# Altium PCB heart.PcbDoc (part 1 of 8)
Units mil, origin at the board's own origin, x right, y up, seen from the top; angles counter-clockwise.
Board outline 5000 x 6000 mil, 2 copper layers (Top Layer, Bottom Layer); 76 components, 43 nets, 328 pads, 50 vias.
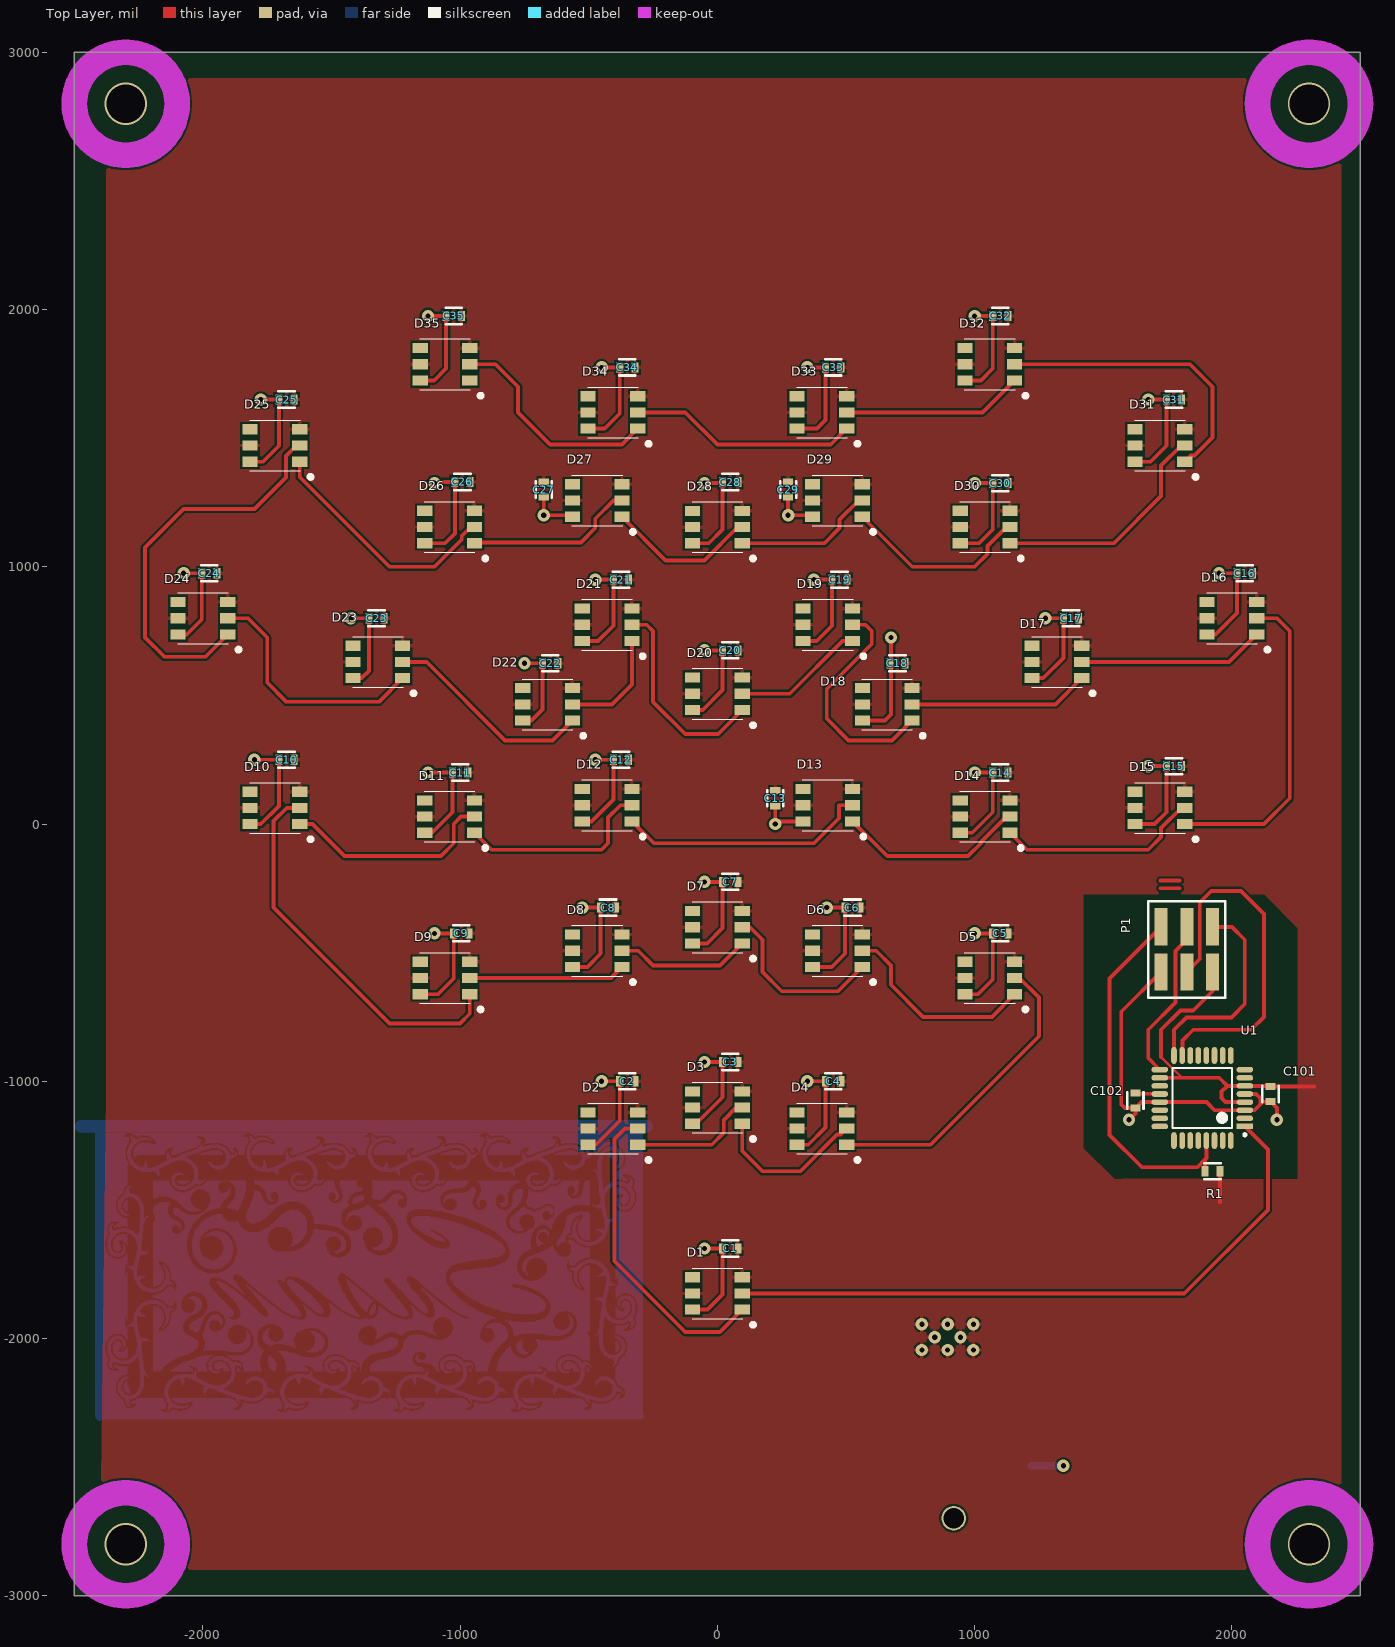
[diagram p0: Top Layer view]
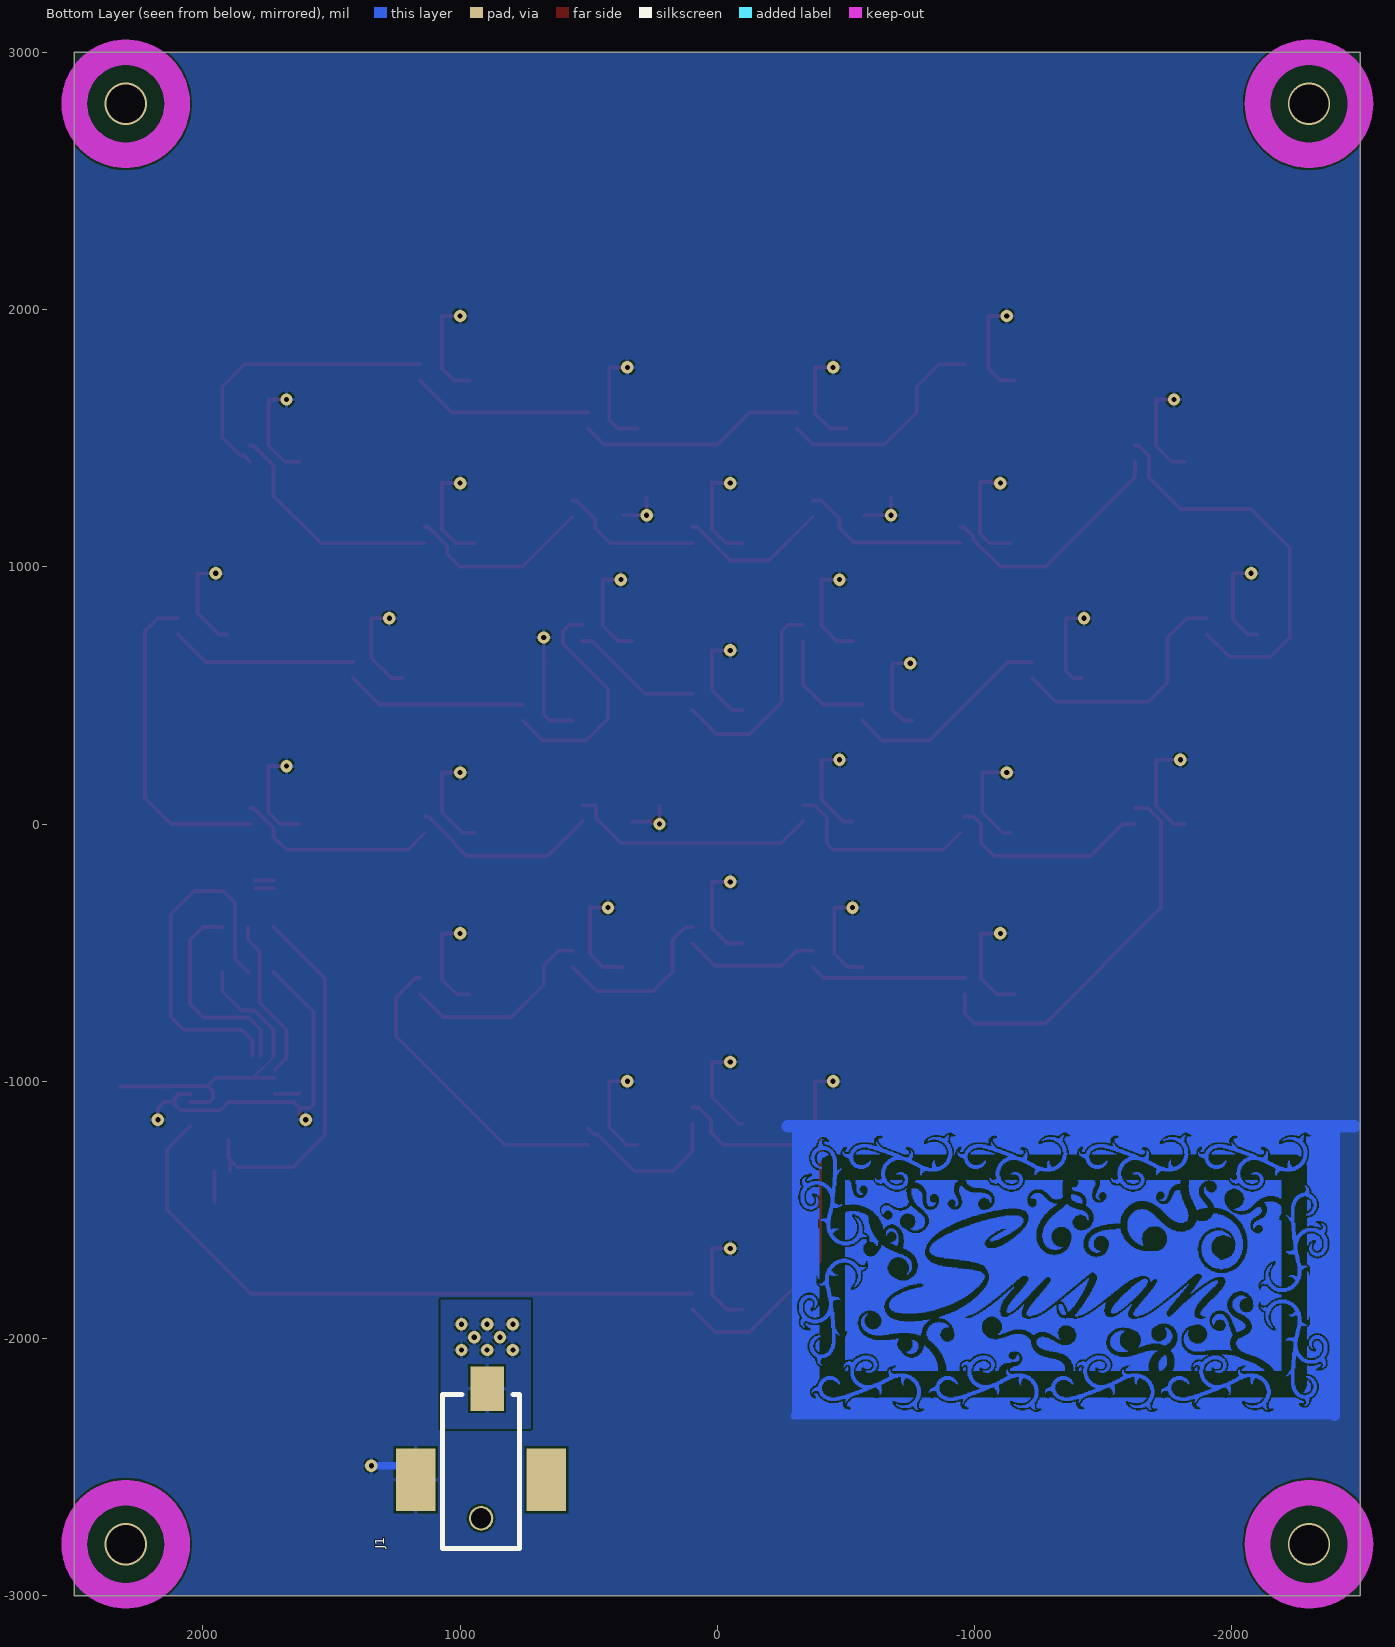
[diagram p1: Bottom Layer view, seen from below]

## Layer stack, top to bottom
Top Solder: solder mask 0.4, Solder Resist, Dk 3.5
Top Layer: signal copper 1.4
Dielectric1: dielectric 12.6, FR-4, Dk 4.8
Bottom Layer: signal copper 1.4
Bottom Solder: solder mask 0.4, Solder Resist, Dk 3.5

## Board outline
-2500,-3000 -2500,3000 2500,3000 2500,-3000

## Design rules (kind name [scope] priority, off if disabled: settings)
Clearance [Not (InRegionRelative(-2500, -2400, -100, -1000) And OnBottomLayer And (Not InAnyNet)) vs Not (InRegionRelative(-2500, -2400, -100, -1000) And OnBottomLayer And (Not InAnyNet))] p1: gap=8
HoleSize [All] p1: absolutevalues=TRUE maxlimit=1000 minlimit=15 maxpercent=80.000 minpercent=20.000
MinimumAnnularRing [All] p1: minimumring=14
MinimumSolderMaskSliver [All] p1: minsoldermaskwidth=0
PlaneConnect [All] p1: planeconnectstyle=Relief reliefexpansion=20 reliefentries=4 reliefconductorwidth=20 reliefairgap=10
PolygonConnect [All] p1: connectstyle=Relief reliefconductorwidth=15 reliefentries=4 polygonreliefangle="90 Angle" airgapwidth=10
RoutingVias [All] p1: holewidth=28 width=50 viastyle="Through Hole" minholewidth=15 minwidth=30 maxholewidth=100 maxwidth=50
ShortCircuit [Not (InRegionRelative(-2500, -2400, -100, -1000) And OnBottomLayer And (Not InAnyNet)) vs Not (InRegionRelative(-2500, -2400, -100, -1000) And OnBottomLayer And (Not InAnyNet))] p1: allowed=FALSE
SilkToSolderMaskClearance SilkscreenOverComponentPads [IsPad] p1: minsilkscreentomaskgap=1 clearancetoexposedcopper=TRUE
SolderMaskExpansion [All] p1: expansion=4
Width [Not (InRegionRelative(-2500, -2400, -100, -1000) And OnBottomLayer And (Not InAnyNet))] p1: maxlimit=1000 minlimit=6 preferedwidth=10
25 further rules are at their usual default settings.

## Classes and differential pairs
channel class LED: D1 D2 D3 D4 D5 D6 D7 D8 D9 D10 D11 D12 D13 D14 D15 D16 D17 D18 D19 D20 D21 D22 D23 D24 D25 D26 D27 D28 D29 D30 D31 D32 D33 D34 D35 D36 D37 D38 D39 D40
net class DI[1..35]: DI1 DI2 DI3 DI4 DI5 DI6 DI7 DI8 DI9 DI10 DI11 DI12 DI13 DI14 DI15 DI16 DI17 DI18 DI19 DI20 DI21 DI22 DI23 DI24 DI25 DI26 DI27 DI28 DI29 DI30 DI31 DI32 DI33 DI34 DI35
component class LEDHeart: C101 C102 J1 P1 R1 U1
component class D35: C35 D35
component class D34: C34 D34
component class D33: C33 D33
component class D32: C32 D32
component class D31: C31 D31
component class D30: C30 D30
component class D29: C29 D29
component class D28: C28 D28
component class D27: C27 D27
component class D26: C26 D26
component class D25: C25 D25
component class D24: C24 D24
component class D23: C23 D23
component class D22: C22 D22
component class D21: C21 D21
component class D20: C20 D20
component class D19: C19 D19
component class D18: C18 D18
component class D17: C17 D17
component class D16: C16 D16
component class D15: C15 D15
component class D14: C14 D14
component class D13: C13 D13
component class D12: C12 D12
component class D11: C11 D11
component class D10: C10 D10
component class D9: C9 D9
component class D8: C8 D8
component class D7: C7 D7
component class D6: C6 D6
component class D5: C5 D5
component class D4: C4 D4
component class D3: C3 D3
component class D2: C2 D2
component class D1: C1 D1
net class DO[1..35]: DO35

## Components (designator, comment, footprint, x,y, rotation, side; value= is the part's Value field where it differs from the comment)
C1 "CAP CER .10UF 25V X7R 10% 0603" 0603 50,-1650 r180 top (schematic designator C3)
C2 "CAP CER .10UF 25V X7R 10% 0603" 0603 -350,-1000 r180 top (schematic designator C3)
C3 "CAP CER .10UF 25V X7R 10% 0603" 0603 50,-925 r180 top
C4 "CAP CER .10UF 25V X7R 10% 0603" 0603 450,-1000 r180 top (schematic designator C3)
C5 "CAP CER .10UF 25V X7R 10% 0603" 0603 1100,-425 r180 top (schematic designator C3)
C6 "CAP CER .10UF 25V X7R 10% 0603" 0603 525,-325 r180 top (schematic designator C3)
C7 "CAP CER .10UF 25V X7R 10% 0603" 0603 50,-225 r180 top (schematic designator C3)
C8 "CAP CER .10UF 25V X7R 10% 0603" 0603 -425,-325 r180 top (schematic designator C3)
C9 "CAP CER .10UF 25V X7R 10% 0603" 0603 -995.47,-425 r180 top (schematic designator C3)
C10 "CAP CER .10UF 25V X7R 10% 0603" 0603 -1675,250 r180 top (schematic designator C3)
C11 "CAP CER .10UF 25V X7R 10% 0603" 0603 -1000,200 r180 top (schematic designator C3)
C12 "CAP CER .10UF 25V X7R 10% 0603" 0603 -375,250 r180 top (schematic designator C3)
C13 "CAP CER .10UF 25V X7R 10% 0603" 0603 225,100 r270 top (schematic designator C3)
C14 "CAP CER .10UF 25V X7R 10% 0603" 0603 1100,200 r180 top (schematic designator C3)
C15 "CAP CER .10UF 25V X7R 10% 0603" 0603 1775,225 r180 top (schematic designator C3)
C16 "CAP CER .10UF 25V X7R 10% 0603" 0603 2050,975 r180 top (schematic designator C3)
C17 "CAP CER .10UF 25V X7R 10% 0603" 0603 1375,800 r180 top (schematic designator C3)
C18 "CAP CER .10UF 25V X7R 10% 0603" 0603 700,625 r180 top (schematic designator C3)
C19 "CAP CER .10UF 25V X7R 10% 0603" 0603 475,950 r180 top (schematic designator C3)
C20 "CAP CER .10UF 25V X7R 10% 0603" 0603 50,675 r180 top (schematic designator C3)
C21 "CAP CER .10UF 25V X7R 10% 0603" 0603 -375,950 r180 top (schematic designator C3)
C22 "CAP CER .10UF 25V X7R 10% 0603" 0603 -650,625 r180 top (schematic designator C3)
C23 "CAP CER .10UF 25V X7R 10% 0603" 0603 -1325,800 r180 top (schematic designator C3)
C24 "CAP CER .10UF 25V X7R 10% 0603" 0603 -1975,975 r180 top (schematic designator C3)
C25 "CAP CER .10UF 25V X7R 10% 0603" 0603 -1675,1650 r180 top (schematic designator C3)
C26 "CAP CER .10UF 25V X7R 10% 0603" 0603 -991,1329.55 r180 top (schematic designator C3)
C27 "CAP CER .10UF 25V X7R 10% 0603" 0603 -675,1300 r270 top (schematic designator C3)
C28 "CAP CER .10UF 25V X7R 10% 0603" 0603 50,1329.26 r180 top (schematic designator C3)
C29 "CAP CER .10UF 25V X7R 10% 0603" 0603 275,1300 r270 top (schematic designator C3)
C30 "CAP CER .10UF 25V X7R 10% 0603" 0603 1100,1325 r180 top (schematic designator C3)
C31 "CAP CER .10UF 25V X7R 10% 0603" 0603 1775,1650 r180 top (schematic designator C3)
C32 "CAP CER .10UF 25V X7R 10% 0603" 0603 1100,1975 r180 top (schematic designator C3)
C33 "CAP CER .10UF 25V X7R 10% 0603" 0603 450,1775 r180 top (schematic designator C3)
C34 "CAP CER .10UF 25V X7R 10% 0603" 0603 -350,1775 r180 top (schematic designator C3)
C35 "CAP CER .10UF 25V X7R 10% 0603" 0603 -1025,1975 r180 top (schematic designator C3)
C101 "CAP CER .10UF 25V X7R 10% 0603" 0603 2150,-1050 r90 top
C102 "CAP CER .10UF 25V X7R 10% 0603" 0603 1625,-1075 r90 top
D1 "WS2812" LED_5050 0,-1825 r0 top
D2 "WS2812" LED_5050 -406,-1183.91 r0 top (schematic designator D1)
D3 "WS2812" LED_5050 0,-1102.5 r0 top (schematic designator D1)
D4 "WS2812" LED_5050 406.15,-1183.91 r0 top (schematic designator D1)
D5 "WS2812" LED_5050 1059.02,-598.65 r0 top (schematic designator D1)
D6 "WS2812" LED_5050 466.69,-492.55 r0 top (schematic designator D1)
D7 "WS2812" LED_5050 0,-401.25 r0 top (schematic designator D1)
D8 "WS2812" LED_5050 -467,-492.55 r0 top (schematic designator D1)
D9 "WS2812" LED_5050 -1059,-598.65 r0 top (schematic designator D1)
D10 "WS2812" LED_5050 -1720,62.6 r0 top (schematic designator D1)
D11 "WS2812" LED_5050 -1041,28.81 r0 top (schematic designator D1)
D12 "WS2812" LED_5050 -428.68,73.12 r0 top (schematic designator D1)
D13 "WS2812" LED_5050 429,73.12 r0 top (schematic designator D1)
D14 "WS2812" LED_5050 1040.93,28.81 r0 top (schematic designator D1)
D15 "WS2812" LED_5050 1720.48,62.6 r0 top (schematic designator D1)
D16 "WS2812" LED_5050 2000,800 r0 top (schematic designator D1)
D17 "WS2812" LED_5050 1320,630 r0 top (schematic designator D1)
D18 "WS2812" LED_5050 660,465 r0 top (schematic designator D1)
D19 "WS2812" LED_5050 429,774.38 r0 top (schematic designator D1)
D20 "WS2812" LED_5050 0,506.25 r0 top (schematic designator D1)
D21 "WS2812" LED_5050 -428.68,774.38 r0 top (schematic designator D1)
D22 "WS2812" LED_5050 -660,465 r0 top (schematic designator D1)
D23 "WS2812" LED_5050 -1320,630 r0 top (schematic designator D1)
D24 "WS2812" LED_5050 -2000,800 r0 top (schematic designator D1)
D25 "WS2812" LED_5050 -1720,1471.41 r0 top (schematic designator D1)
D26 "WS2812" LED_5050 -1041,1154.55 r0 top (schematic designator D1)
D27 "WS2812" LED_5050 -467,1257.55 r0 top (schematic designator D1)
D28 "WS2812" LED_5050 0,1154.26 r0 top (schematic designator D1)
D29 "WS2812" LED_5050 466.69,1257.55 r0 top (schematic designator D1)
D30 "WS2812" LED_5050 1040.93,1154.55 r0 top (schematic designator D1)
D31 "WS2812" LED_5050 1720.48,1471.41 r0 top (schematic designator D1)
D32 "WS2812" LED_5050 1059.02,1787.18 r0 top (schematic designator D1)
D33 "WS2812" LED_5050 406.15,1599.9 r0 top (schematic designator D1)
D34 "WS2812" LED_5050 -406,1599.9 r0 top (schematic designator D1)
D35 "WS2812" LED_5050 -1059,1787.18 r0 top (schematic designator D1)
J1 "CONN_PWR2.0_SMT" CONN_PWR2.0_SMT 918.62,-2817.05 r90 bottom
P1 "Header, 3-Pin, Dual row" CONN_HDR_SMT_6_2R 1925,-400 r270 top
R1 "RES_4.70K_OHM_1/10W_1%_0603_SMD" 0603 1925,-1350 r0 top
U1 "IC_AVR_MCU_4K_10MHZ_1.8V_32TQFP" 32A_N 1885.24,-1065.35 r180 top

## Footprints (in the part's own frame and the unit in brackets; to place one, negate y for a bottom-side part, rotate by r counter-clockwise, add the part's x,y. Pads: shape width x height; smd on the part's side, far side on the other; paste and mask are expansions set on the pad)
32A_N [mm] "Thin QFP, 32-Leads, Body 7x7mm, Pitch 0.8mm, IPC Medium Density"
  rect 1.65x0.55 smd: 1(-4.2,2.8)
  oval 1.65x0.55 smd: 2(-4.2,2) 3(-4.2,1.2) 4(-4.2,0.4) 5(-4.2,-0.4) 6(-4.2,-1.2) 7(-4.2,-2) 8(-4.2,-2.8) 17(4.2,-2.8) 18(4.2,-2) 19(4.2,-1.2) 20(4.2,-0.4) 21(4.2,0.4) 22(4.2,1.2) 23(4.2,2) 24(4.2,2.8)
  oval 0.55x1.65 smd: 9(-2.8,-4.2) 10(-2,-4.2) 11(-1.2,-4.2) 12(-0.4,-4.2) 13(0.4,-4.2) 14(1.2,-4.2) 15(2,-4.2) 16(2.8,-4.2) 25(2.8,4.2) 26(2,4.2) 27(1.2,4.2) 28(0.4,4.2) 29(-0.4,4.2) 30(-1.2,4.2) 31(-2,4.2) 32(-2.8,4.2)
  silkscreen extent -4.33,-2.95 2.95,3.75, body extent -3.5,-3.5 3.5,3.5, height 1.2
0603 [mm]
  rect 0.7x1 smd: 1(-0.75,0) 2(0.75,0)
  silkscreen extent -0.8,-0.8 0.8,0.8, body extent -0.8,-0.8 0.8,0.8, height 0.45
CONN_HDR_SMT_6_2R [mil]
  rect 145x50 smd: 1(0,0) 2(175,0) 3(0,-100) 4(175,-100) 5(0,-200) 6(175,-200)
  silkscreen extent -100,-250 275,50, body extent -50,-250 225,50, height 379
CONN_PWR2.0_SMT [mm]
  rect 4.4x3.3 smd: 1(15.8,-0.6)
  rect 6.2x3.9 smd: 2(6.8,6.45) 3(6.8,-6.45)
  round 2.413 hole 2: ""(3,0)
  silkscreen extent 0,-3.81 15.24,3.81, body extent 0,-7.6 17.1,7.6, height 11.05
LED_5050 [mm]
  rect 1.5x1 smd: 1(2.45,-1.6) 2(2.45,0) 3(2.45,1.6) 4(-2.45,1.6) 5(-2.45,0) 6(-2.45,-1.6)
  silkscreen extent -2.5,-3.28 3.7,2.5, body extent -2.65,-2.5 2.65,2.5, height 1.6

## Part data
C1 C2 C3 C4 C5 C6 C7 C8 C9 C10 C11 C12 C13 C14 C15 C16 C17 C18 C19 C20 C21 C22 C23 C24 C25 C26 C27 C28 C29 C30 C31 C32 C33 C34 C35 C101 C102: library part CAP_CER_.10UF_25V_X7R_10%_0603_1
J1: "CONN PWR JACK 2.0X6.3MM SMT"
P1: library part CONN_Header_0.100_6pos
R1: "RES 4.70K OHM 1/10W 1% 0603 SMD"
U1: library part IC_AVR_MCU_4K_10MHZ_1.8V_32TQFP_1, "IC AVR MCU 4K 10MHZ 1.8V 32TQFP"

## Via types
v1: diameter 48, hole 20, Top Layer to Bottom Layer, 46 vias
v2: diameter 165, hole 150, Top Layer to Bottom Layer, 4 vias

## Nets (pads, with @x,y where several pads share a name; then routed paths per layer and width w, separated by ;. In a path a pad name is that pad's centre, name@x,y a point inside that pad or via, vN(x,y) a via of type N, cw(c..) or ccw(c..) an arc to the next point about the centre after c; other vN are vias at no path point)
DI1: D1.2 U1.1 | length 2539.6
  Top Layer w15: D1.2@96.46,-1825 1815,-1825 2140,-1500 2140,-1265 U1.1@2050.59,-1175.59
DI2: D1.1 D2.2 | length 1228.9
  Top Layer w15: D2.2@-309.54,-1183.91 -358.91,-1183.91 -400,-1225 -400,-1700 -125,-1975 9.45,-1975 D1.1@96.46,-1887.99
DI3: D2.1 D3.2 | length 495.1
  Top Layer w15: D2.1@-309.54,-1246.91 -21.91,-1246.91 25,-1200 25,-1150 72.5,-1102.5 D3.2@96.46,-1102.5
DI4: D3.1 D4.2 | length 613.4
  Top Layer w15: D3.1@96.46,-1165.49 96.46,-1271.46 175,-1350 322.72,-1350 465,-1207.72 478.8,-1207.72 D4.2@502.61,-1183.91
DI5: D4.1 D5.2 | length 1198.3
  Top Layer w15: D4.1@502.61,-1246.91 828.09,-1246.91 1250,-825 1250,-675 1173.65,-598.65 D5.2@1155.47,-598.65
DI6: D5.1 D6.2 | length 779.5
  Top Layer w15: D6.2@563.15,-492.54 617.54,-492.54 675,-550 675,-625 800,-750 1067.12,-750 D5.1@1155.47,-661.64
DI7: D6.1 D7.2 | length 682.1
  Top Layer w15: D7.2@96.46,-401.25 126.25,-401.25 175,-450 175,-575 250,-650 468.68,-650 D6.1@563.15,-555.54
DI8: D7.1 D8.2 | length 526.3
  Top Layer w15: D8.2@-370.54,-492.54 -307.46,-492.54 -250,-550 10.7,-550 D7.1@96.46,-464.24
DI9: D8.1 D9.2 | length 609.9
  Top Layer w15: D9.2@-962.54,-598.65 -413.66,-598.65 D8.1@-370.54,-555.54
DI10: D9.1 D10.2 | length 1499.6
  Top Layer w15: D10.2@-1623.54,62.6 -1674.21,62.6 -1725,11.82 -1725,-325 -1275,-775 -1000,-775 -962.54,-737.54 D9.1@-962.54,-661.64
DI11: D10.1 D11.2 | length 824.5
  Top Layer w15: D10.1@-1623.54,-0.39 -1574.61,-0.39 -1450,-125 -1075,-125 -1025,-75 -1025,0 -996.19,28.81 D11.2@-958.34,28.81
DI12: D11.1 D12.2 | length 769.9
  Top Layer w15: D11.1@-944.54,-34.18 -878.72,-100 -450,-100 -425,-75 -425,25 -376.87,73.13 D12.2@-332.23,73.13
DI13: D12.1 D13.2 | length 983.6
  Top Layer w15: D12.1@-332.23,10.13 -247.09,-75 375,-75 472.47,22.47 472.47,72.47 473.13,73.13 D13.2@525.46,73.13
DI14: D13.1 D14.2 | length 734.7
  Top Layer w15: D13.1@525.46,10.13 660.59,-125 975,-125 1025,-75 1025,-69.77 1123.59,28.81 D14.2@1137.38,28.81
DI15: D14.1 D15.2 | length 794.4
  Top Layer w15: D14.1@1137.38,-34.18 1203.2,-100 1675,-100 1725,-50 1725,-15.53 1803.14,62.6 D15.2@1816.93,62.6
DI16: D15.1 D16.2 | length 1248.9
  Top Layer w15: D15.1@1816.93,-0.39 2124.61,-0.39 2225,100 2225,750 2175,800 D16.2@2096.46,800
DI17: D16.1 D17.2 | length 724.3
  Top Layer w15: D17.2@1416.46,630 1989.45,630 D16.1@2096.46,737.01
DI18: D17.1 D18.2 | length 702.3
  Top Layer w15: D18.2@756.46,465 1314.45,465 D17.1@1416.46,567.01
DI19: D18.1 D19.2 | length 895.7
  Top Layer w15: D19.2@525.46,774.38 575.62,774.38 600,750 600,700 425,525 425,410 510,325 679.45,325 D18.1@756.46,402.01
DI20: D19.1 D20.2 | length 514
  Top Layer w15: D20.2@96.46,506.25 281.25,506.25 486.38,711.38 D19.1@525.46,711.38
DI21: D20.1 D21.2 | length 804.2
  Top Layer w15: D21.2@-332.23,774.38 -274.38,774.38 -250,750 -250,475 -125,350 3.2,350 D20.1@96.46,443.26
DI22: D21.1 D22.2 | length 432.1
  Top Layer w15: D22.2@-563.54,465 -410,465 -332.23,542.77 D21.1@-332.23,711.38
DI23: D22.1 D23.2 | length 818.2
  Top Layer w15: D23.2@-1223.54,630 -1130,630 -825,325 -640.55,325 D22.1@-563.54,402.01
DI24: D23.1 D24.2 | length 955.2
  Top Layer w15: D24.2@-1903.54,800 -1825,800 -1750,725 -1750,550 -1675,475 -1315.55,475 D23.1@-1223.54,567.01
DI25: D24.1 D25.2 | length 1553.3
  Top Layer w15: D24.1@-1903.54,737.01 -1990.55,650 -2150,650 -2225,725 -2225,1075 -2075,1225 -1800,1225 -1677.53,1347.47 -1677.53,1431.23 -1637.34,1471.42 D25.2@-1623.54,1471.42
DI26: D25.1 D26.2 | length 954.8
  Top Layer w15: D25.1@-1623.54,1408.42 -1623.54,1348.54 -1275,1000 -1100,1000 -993.57,1106.43 -993.57,1119.32 -958.34,1154.55 D26.2@-944.54,1154.55
DI27: D26.1 D27.2 | length 664.3
  Top Layer w15: D26.1@-944.54,1091.56 -941.6,1094.5 -530.5,1094.5 -475,1150 -475,1186.82 -404.27,1257.55 D27.2@-370.54,1257.55
DI28: D27.1 D28.2 | length 590.8
  Top Layer w15: D27.1@-370.54,1194.55 -200.99,1025 -50,1025 79.26,1154.26 D28.2@96.46,1154.26
DI29: D28.1 D29.2 | length 555
  Top Layer w15: D28.1@96.46,1091.27 416.27,1091.27 475,1150 475,1183.2 549.35,1257.55 D29.2@563.15,1257.55
DI30: D29.1 D30.2 | length 737
  Top Layer w15: D29.1@563.15,1194.55 757.7,1000 1000,1000 1050,1050 1050,1080.97 1123.59,1154.55 D30.2@1137.38,1154.55
DI31: D30.1 D31.2 | length 906.2
  Top Layer w15: D30.1@1137.38,1091.56 1541.56,1091.56 1725,1275 1725,1393.28 1803.14,1471.42 D31.2@1816.93,1471.42
DI32: D31.1 D32.2 | length 1150.1
  Top Layer w15: D32.2@1155.47,1787.18 1837.82,1787.18 1925,1700 1925,1502.69 1854.54,1432.23 1840.74,1432.23 D31.1@1816.93,1408.42
DI33: D32.1 D33.2 | length 704.3
  Top Layer w15: D33.2@502.61,1599.9 1031.19,1599.9 D32.1@1155.47,1724.19
DI34: D33.1 D34.2 | length 889.5
  Top Layer w15: D34.2@-309.54,1599.9 -124.9,1599.9 0,1475 440.7,1475 D33.1@502.61,1536.91
DI35: D34.1 D35.2 | length 866.5
  Top Layer w15: D35.2@-962.54,1787.18 -862.18,1787.18 -775,1700 -775,1600 -650,1475 -371.45,1475 D34.1@-309.54,1536.91
DO35: D35.1
GND: C1.2 C2.2 C3.2 C4.2 C5.2 C6.2 C7.2 C8.2 C9.2 C10.2 C11.2 C12.2 C13.2 C14.2 C15.2 C16.2 C17.2 C18.2 C19.2 C20.2 C21.2 C22.2 C23.2 C24.2 C25.2 C26.2 C27.2 C28.2 C29.2 C30.2 C31.2 C32.2 C33.2 C34.2 C35.2 C101.1 C102.1 D1.6 D2.6 D3.6 D4.6 D5.6 D6.6 D7.6 D8.6 D9.6 D10.6 D11.6 D12.6 D13.6 D14.6 D15.6 D16.6 D17.6 D18.6 D19.6 D20.6 D21.6 D22.6 D23.6 D24.6 D25.6 D26.6 D27.6 D28.6 D29.6 D30.6 D31.6 D32.6 D33.6 D34.6 D35.6 J1.2 P1.6 U1.3 U1.5 U1.21 | length 20988
  Top Layer w15: D24.6@-2096.46,737.01 -2062.99,737.01 -2004.53,795.47 C24.2@-2004.53,975 v1(-2075,975) ; D10.6@-1816.46,-0.39 -1775.39,-0.39 -1704.53,70.47 C10.2@-1704.53,250 v1(-1800,250) ; D25.6@-1816.46,1408.42 -1766.58,1408.42 -1704.53,1470.47 C25.2@-1704.53,1650 v1(-1775,1650) ; v1(-1425,800) C23.2@-1354.53,800 -1354.53,595.47 -1382.99,567.01 D23.6@-1416.46,567.01 ; D9.6@-1155.46,-661.64 -1086.64,-661.64 -1025,-600 C9.2@-1025,-425 v1(-1100,-425) ; D35.6@-1155.46,1724.19 -1100.81,1724.19 -1054.53,1770.47 C35.2@-1054.53,1975 v1(-1125,1975) ; D11.6@-1137.46,-34.18 -1109.18,-34.18 -1029.53,45.47 C11.2@-1029.53,200 v1(-1125,200) ; D26.6@-1137.46,1091.56 -1058.44,1091.56 -1020.57,1129.43 C26.2@-1020.57,1329.51 ; v1(-1100,1325) -1095.49,1329.51 C26.2@-1020.57,1329.51 ; C26.2@-1020.53,1329.55 C26.2@-1020.57,1329.51 ; D22.6@-756.46,402.01 -722.99,402.01 -679.53,445.47 C22.2@-679.53,625 v1(-750,625) ; C27.2@-675,1270.47 v1(-675,1200) D27.6@-568.9,1200 ; D8.6@-563.46,-555.54 -505.54,-555.54 -454.53,-504.53 C8.2@-454.53,-325 v1(-525,-325) ; D12.6@-525.14,10.13 -489.87,10.13 -404.53,95.47 C12.2@-404.53,250 v1(-475,250) ; D21.6@-525.14,711.38 -463.62,711.38 -404.53,770.47 C21.2@-404.53,950 v1(-475,950) ; D2.6@-502.46,-1246.91 -471.91,-1246.91 -379.53,-1154.53 C2.2@-379.53,-1000 v1(-450,-1000) ; D34.6@-502.46,1536.91 -438.09,1536.91 -379.53,1595.47 C34.2@-379.53,1775 v1(-450,1775) ; D1.6@-96.46,-1887.99 -37.99,-1887.99 20.47,-1829.53 C1.2@20.47,-1650 v1(-50,-1650) ; D3.6@-96.46,-1165.49 -82.66,-1165.49 20.47,-1062.36 C3.2@20.47,-925 v1(-50,-925) ; D7.6@-96.46,-464.24 -39.24,-464.24 20.47,-404.53 C7.2@20.47,-225 v1(-50,-225) ; D20.6@-96.46,443.26 -56.74,443.26 20.47,520.47 C20.2@20.47,675 v1(-50,675) ; D28.6@-96.46,1091.27 -33.73,1091.27 20.47,1145.47 C28.2@20.47,1329.26 16.21,1325 v1(-50,1325) ; v1(225,0) C13.2@225,70.47 ; v1@235.13,10.13 D13.6@332.54,10.13 ; C29.2@275,1270.47 v1(275,1200) D29.6@364.79,1200 ; D4.6@309.69,-1246.91 353.09,-1246.91 420.47,-1179.53 C4.2@420.47,-1000 v1(350,-1000) ; D33.6@309.69,1536.91 386.91,1536.91 420.47,1570.47 C33.2@420.47,1775 v1(350,1775) ; D19.6@332.54,711.38 386.38,711.38 445.47,770.47 C19.2@445.47,950 v1(375,950) ; D6.6@370.23,-555.54 444.46,-555.54 495.47,-504.53 C6.2@495.47,-325 v1(425,-325) ; D18.6@563.54,402.01 652.01,402.01 675,425 675,620.47 C18.2@670.47,625 ; C18.2@675,629.53 v1(675,725) ; D14.6@944.47,-34.18 990.82,-34.18 1070.47,45.47 C14.2@1070.47,200 v1(1000,200) ; D30.6@944.47,1091.56 1016.56,1091.56 1070.47,1145.47 C30.2@1070.47,1325 v1(1000,1325) ; D5.6@962.56,-661.64 1013.36,-661.64 1070.47,-604.53 C5.2@1070.47,-425 v1(1000,-425) ; D32.6@962.56,1724.19 1024.19,1724.19 1070.47,1770.47 C32.2@1070.47,1975 v1(1000,1975) ; D17.6@1223.54,567.01 1267.01,567.01 1345.47,645.47 C17.2@1345.47,800 v1(1275,800) ; v1(1600,-1150) 1625,-1125 C102.1@1625,-1104.53 ; D15.6@1624.02,-0.39 1699.61,-0.39 1745.47,45.47 C15.2@1745.47,225 v1(1675,225) ; D31.6@1624.02,1408.42 1683.42,1408.42 1745.47,1470.47 C31.2@1745.47,1650 v1(1675,1650) ; P1.6@1725,-575 1570,-730 1570,-1090 1584.53,-1104.53 C102.1@1625,-1104.53 ; D16.6@1903.54,737.01 1937.01,737.01 2020.47,820.47 C16.2@2020.47,975 v1(1950,975) ; U1.5@2050.59,-1049.61 2094.49,-1049.61 2110.24,-1065.35 2110.24,-1090.35 ; v1(2175,-1150) 2175,-1104.53 C101.1@2150,-1079.53 2121.06,-1079.53 2110.24,-1090.35 ; C102.1@1625,-1104.53 1648.43,-1081.1 U1.21@1719.88,-1081.1 1900.98,-1081.1 1932.48,-1112.6 U1.3@2050.59,-1112.6 2087.99,-1112.6 2110.24,-1090.35
  Bottom Layer w20: -300,-2300 -300,-1200
  Bottom Layer w30: -2400,-2300 -300,-2300 ; J1.2@1220,-2495 v1(1345,-2495)
  Bottom Layer w40: -2400,-2300 -2400,-1200
  Bottom Layer w50: -2475,-1175 -275,-1175
MISO: P1.1 U1.16 | length 812.1
  Top Layer w15: U1.16@1775,-900 1775,-800 1823,-752 1998,-752 2050,-700 2050,-450 2000,-400 P1.1@1925,-400
MOSI: P1.4 U1.15 | length 1414
  Top Layer w15: U1.15@1806.5,-900 1807.67,-898.83 1807.67,-842.33 1850,-800 2075,-800 2125,-750 2125,-350 2035,-260 1920,-260 1875,-305 1875,-525 P1.4@1825,-575 P1.4@1822.43,-577.57
NetC102_2: C102.2 U1.20 | length 96.6
  Top Layer w15: C102.2@1625,-1045.47 1627.96,-1048.44 1718.71,-1048.44 U1.20@1719.88,-1049.61
RESET: P1.5 R1.1 U1.29 | length 1448.2
  Top Layer w15: P1.5@1725,-400 1525,-600 1525,-1209.25 1650,-1334.25 1865.75,-1334.25 1895.47,-1304.53 ; R1.1@1895.47,-1350 1895.47,-1304.53 ; U1.29@1900.98,-1230.71 1900.98,-1299.02 1895.47,-1304.53
SCK: P1.3 U1.17 | length 635.8
  Top Layer w15: U1.17@1719.88,-955.12 1675,-910.24 1675,-800 1780.5,-694.5 1780.5,-494.42 1825,-449.92 P1.3@1825,-400
VCC: C1.1 C2.1 C3.1 C4.1 C5.1 C6.1 C7.1 C8.1 C9.1 C10.1 C11.1 C12.1 C13.1 C14.1 C15.1 C16.1 C17.1 C18.1 C19.1 C20.1 C21.1 C22.1 C23.1 C24.1 C25.1 C26.1 C27.1 C28.1 C29.1 C30.1 C31.1 C32.1 C33.1 C34.1 C35.1 C101.2 D1.3 D1.5 D2.3 D2.5 D3.3 D3.5 D4.3 D4.5 D5.3 D5.5 D6.3 D6.5 D7.3 D7.5 D8.3 D8.5 D9.3 D9.5 D10.3 D10.5 D11.3 D11.5 D12.3 D12.5 D13.3 D13.5 D14.3 D14.5 D15.3 D15.5 D16.3 D16.5 D17.3 D17.5 D18.3 D18.5 D19.3 D19.5 D20.3 D20.5 D21.3 D21.5 D22.3 D22.5 D23.3 D23.5 D24.3 D24.5 D25.3 D25.5 D26.3 D26.5 D27.3 D27.5 D28.3 D28.5 D29.3 D29.5 D30.3 D30.5 D31.3 D31.5 D32.3 D32.5 D33.3 D33.5 D34.3 D34.5 D35.3 D35.5 J1.1 P1.2 R1.2 U1.4 U1.6 U1.18 | length 1441.5
  Top Layer w9: 1725,-905.59 1805,-985.59 1805,-986.61
  Top Layer w15: U1.18@1719.88,-986.61 1805,-986.61 1950.98,-986.61 1982.48,-1018.11 ; 1725,-905.12 1725,-800 1800,-725 1850,-725 1925,-650 P1.2@1925,-575 ; 1954.53,-1470.47 R1.2@1954.53,-1350 ; U1.4@2050.59,-1081.1 1975.98,-1081.1 1960.24,-1065.35 1960.24,-1040.35 1982.48,-1018.11 ; C101.2@2147.64,-1018.11 U1.6@2050.59,-1018.11 1982.48,-1018.11 ; C101.2@2150,-1020.47 2320.47,-1020.47
  other v1: 795,-2045 895,-2045 995,-2045 845,-1995 945,-1995 795,-1945 895,-1945 995,-1945
pads on no net: D1.4 D2.4 D3.4 D4.4 D5.4 D6.4 D7.4 D8.4 D9.4 D10.4 D11.4 D12.4 D13.4 D14.4 D15.4 D16.4 D17.4 D18.4 D19.4 D20.4 D21.4 D22.4 D23.4 D24.4 D25.4 D26.4 D27.4 D28.4 D29.4 D30.4 D31.4 D32.4 D33.4 D34.4 D35.4 J1. J1.3 U1.2 U1.7 U1.8 U1.9 U1.10 U1.11 U1.12 U1.13 U1.14 U1.19 U1.22 U1.23 U1.24 U1.25 U1.26 U1.27 U1.28 U1.30 U1.31 U1.32
copper on no net: | length 501838.5
  Top Layer w15: 1722.5,-250 1797.5,-250 ; 1722.5,-220 1797.5,-220